# Altium PCB POWER.PcbDoc
Units mil, origin at the board's own origin, x right, y up, seen from the top; angles counter-clockwise.
Board outline 2661.42 x 2657.48 mil, 2 copper layers (Top Layer, Bottom Layer); 17 components, 3 nets, 37 pads, 4 vias.
Unrouted connection lines stored in the file: 1.
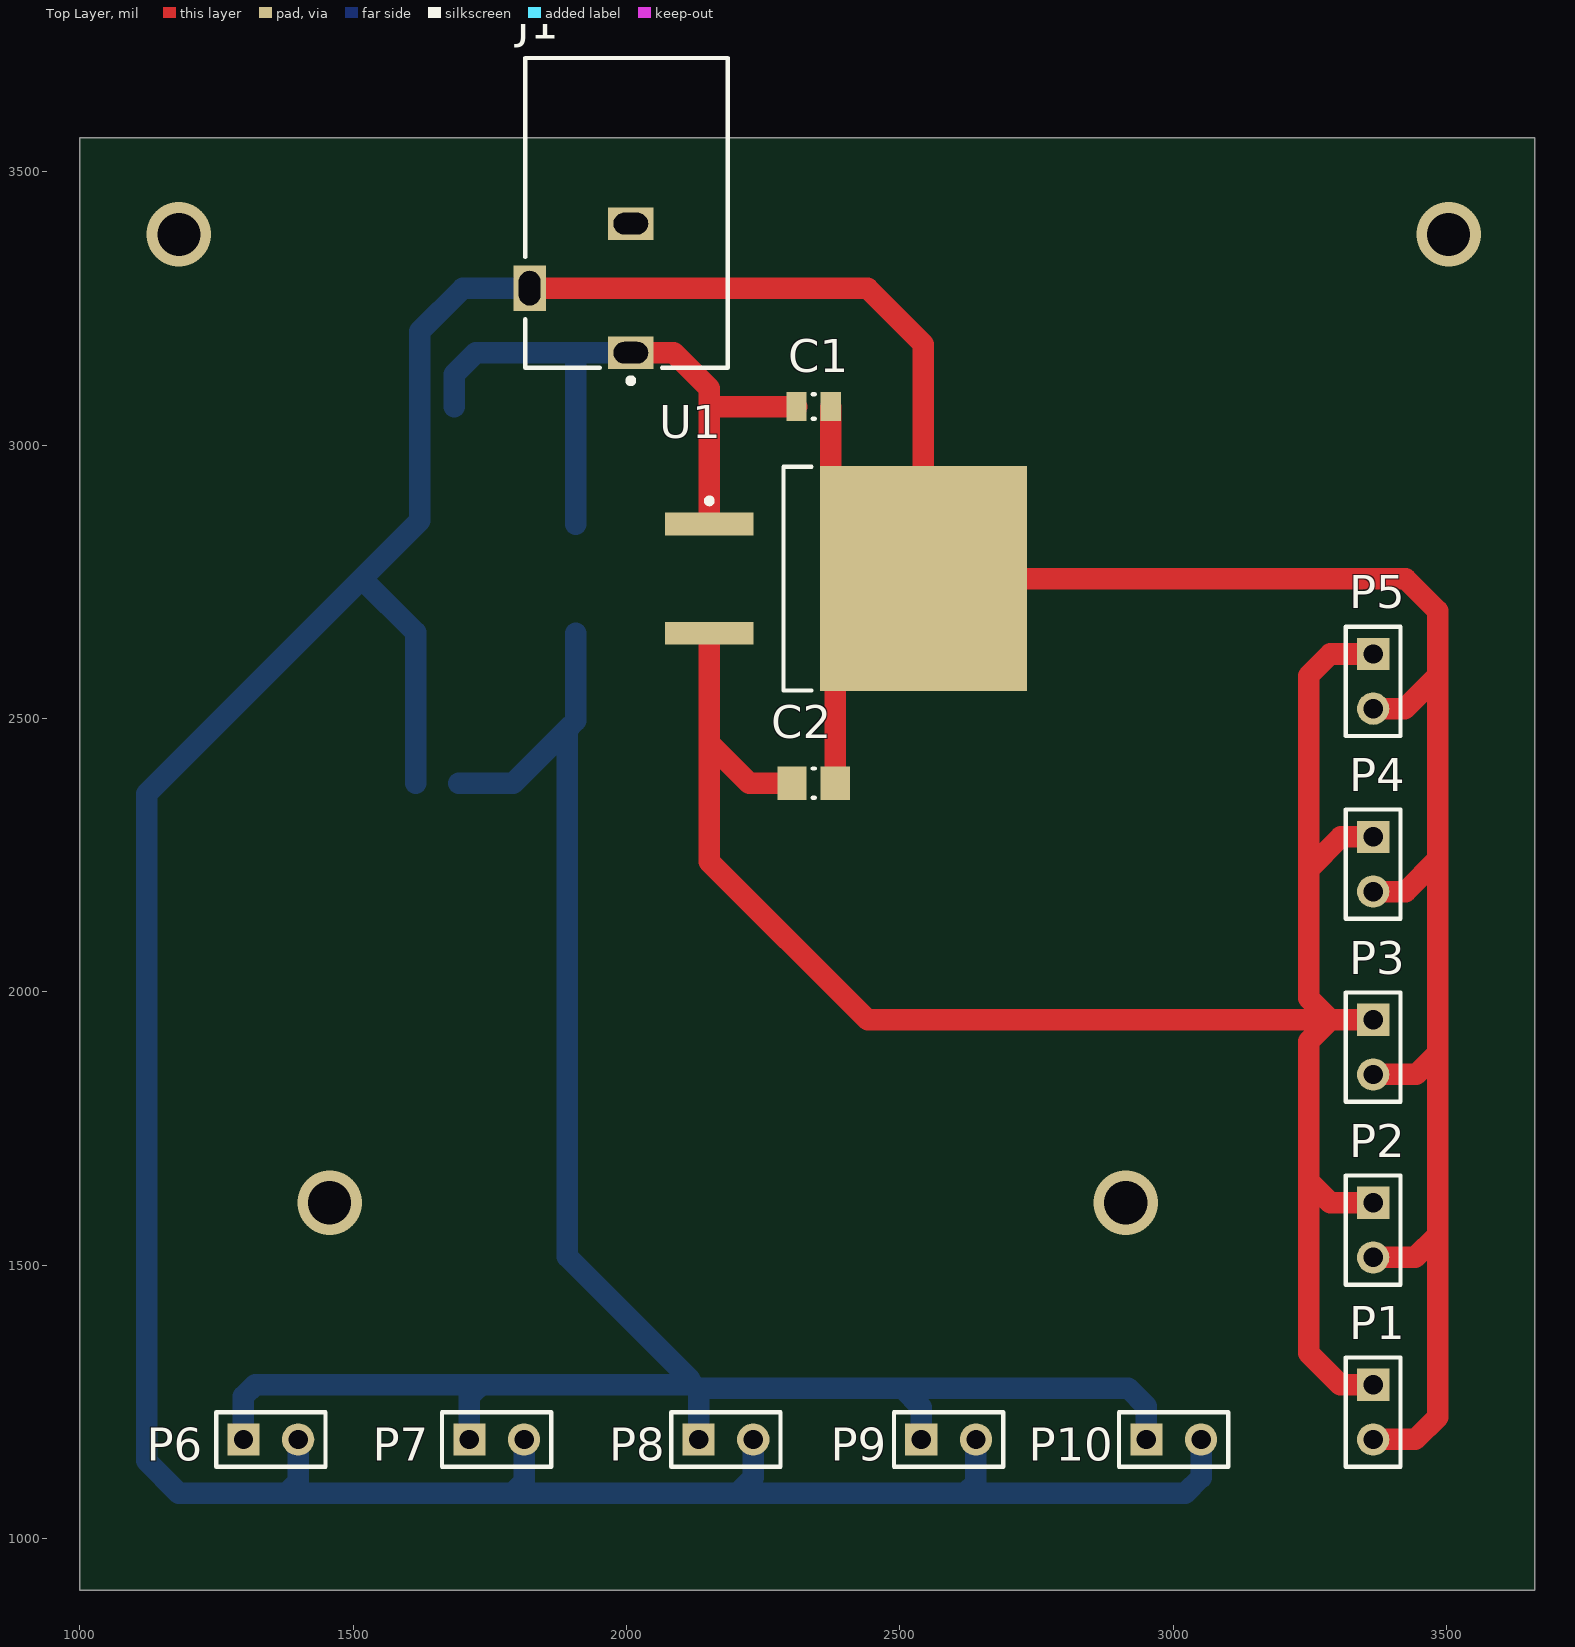
[diagram p0: Top Layer view]
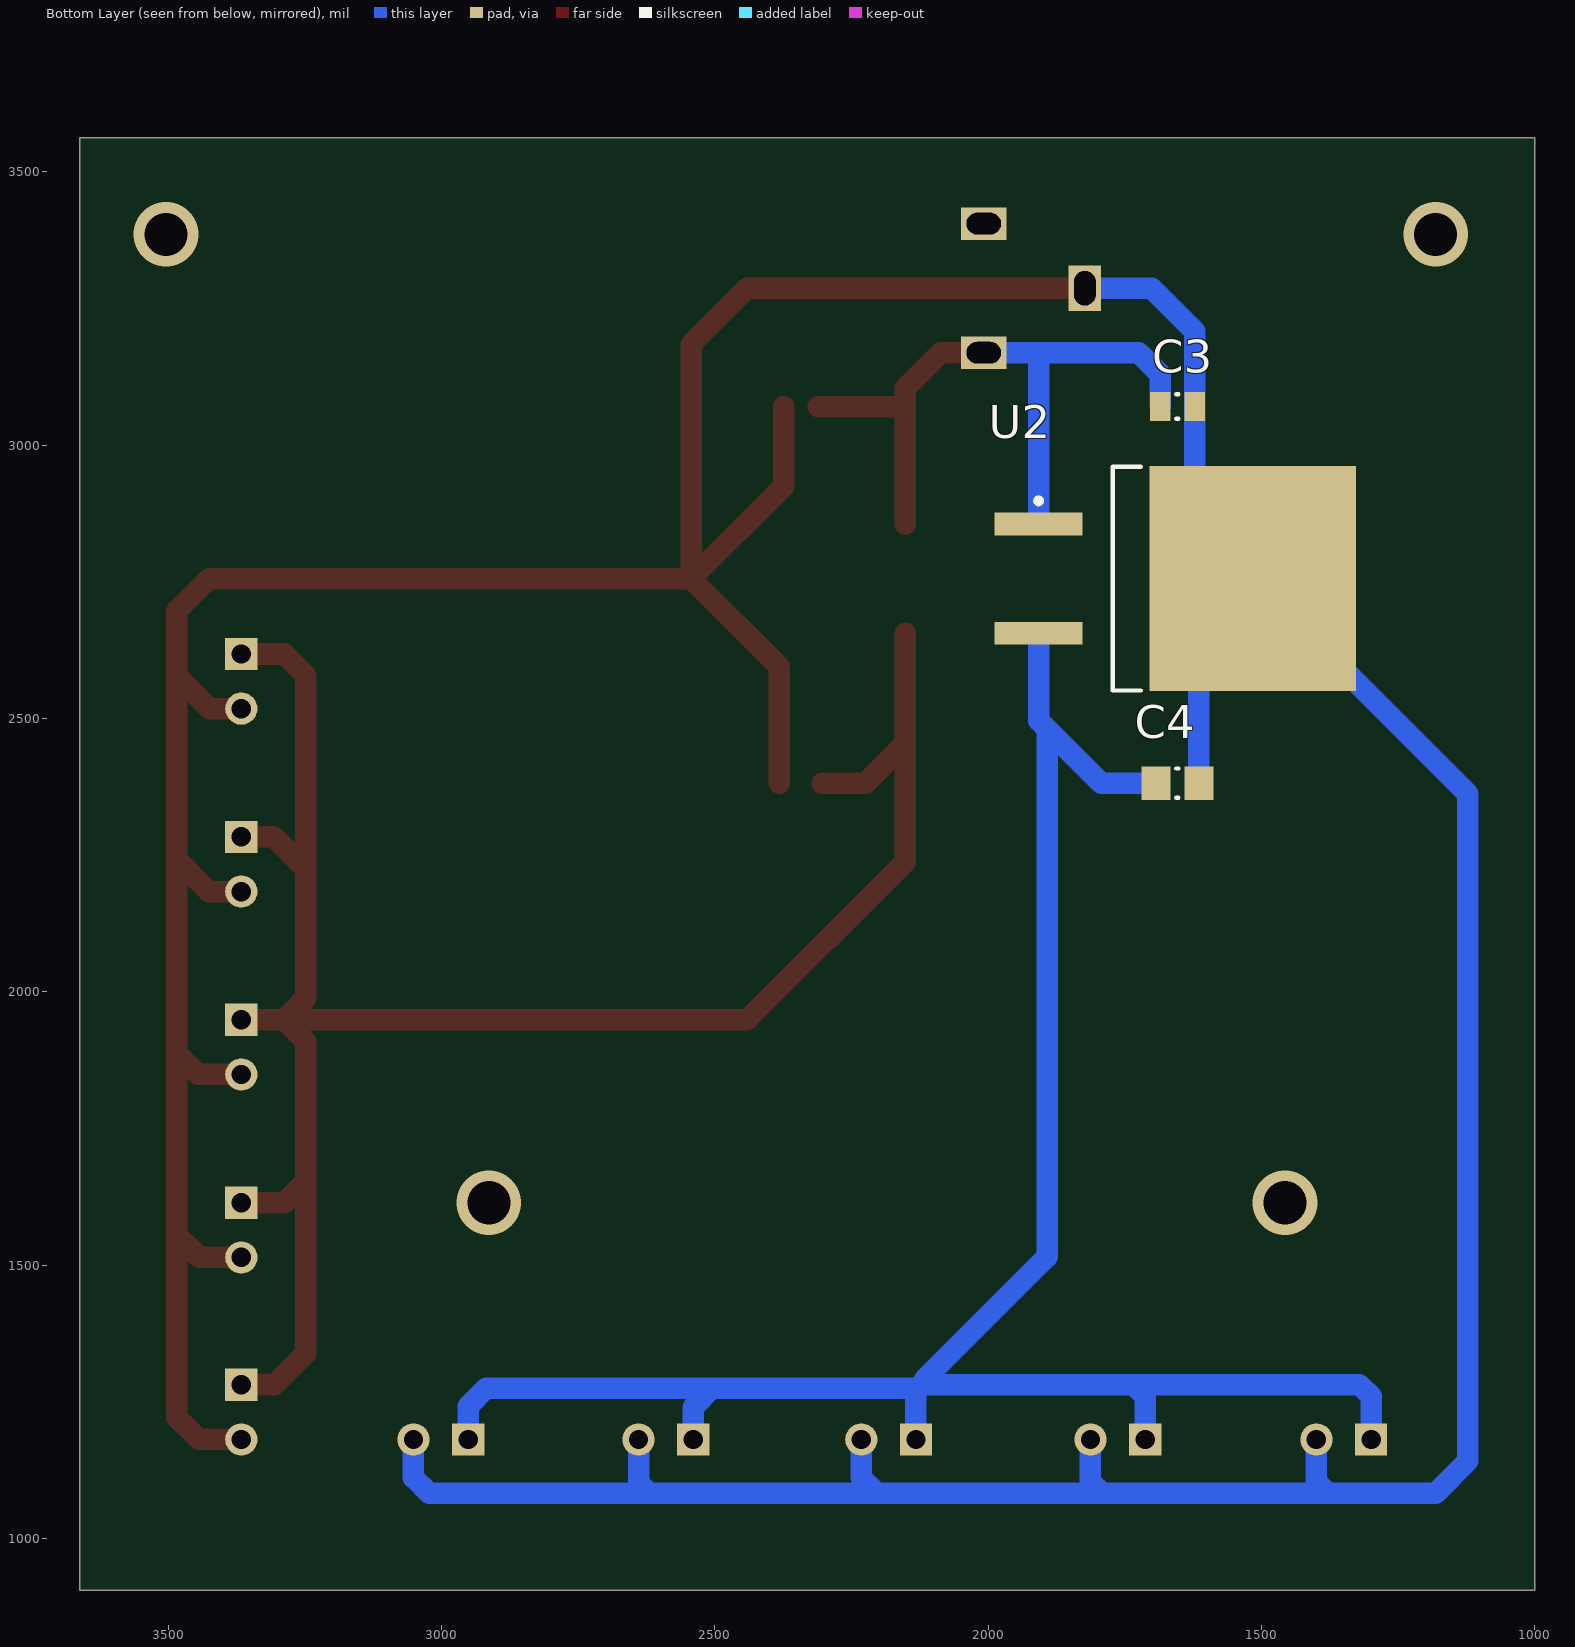
[diagram p1: Bottom Layer view, seen from below]

## Layer stack, top to bottom
Top Solder: solder mask 0.4, Solder Resist, Dk 3.5
Top Layer: signal copper 1.4
Dielectric 1: dielectric 12.6, FR-4, Dk 4.8
Bottom Layer: signal copper 1.4
Bottom Solder: solder mask 0.4, Solder Resist, Dk 3.5

## Board outline
1000,905.51 3661.42,905.51 3661.42,3562.99 1000,3562.99

## Design rules (kind name [scope] priority, off if disabled: settings)
Clearance [All] p1: gap=10 ignorepadtopadclearanceinfootprint=FALSE except(0: Arc-Hole Track-Hole SMDPad-Hole THPad-Hole Via-Hole Fill-Hole Poly-Hole Region-Hole Text-Hole)
PolygonConnect [All] p1: connectstyle=Relief reliefconductorwidth=10 reliefentries=4 polygonreliefangle="90 Angle" airgapwidth=10
RoutingVias [All] p1: holewidth=28 width=50 viastyle="Through Hole" minholewidth=28 minwidth=50 maxholewidth=78.74 maxwidth=118.11
SolderMaskExpansion [All] p1: expansion=4
Width [All] p1: maxlimit=39.37 minlimit=10 preferedwidth=39.37 minimp=50.000000 maximp=50.000000 favimp=50.000000
30 further rules are at their usual default settings.

## Components (designator, comment, footprint, x,y, rotation, side; value= is the part's Value field where it differs from the comment)
C1 "0805 330nF" CAPC0805(2012)100_L 2342.52,3070.87 r0 top value=330nF
C2 "0805 100nF" CAPC0805(2012)100_M 2342.52,2381.89 r180 top value=100nF
C3 "0805 330nF" CAPC0805(2012)100_L 1653.54,3070.87 r180 bottom value=330nF
C4 "0805 100nF" CAPC0805(2012)100_M 1653.54,2381.89 r0 bottom value=100nF
J1 "PJ-102B" CUI-PJ-102B_V 2007.87,3287.4 r90 top
P1 "Header 2" HDR1X2 3366.14,1281.1 r270 top
P2 "Header 2" HDR1X2 3366.14,1614.17 r270 top
P3 "Header 2" HDR1X2 3366.14,1948.82 r270 top
P4 "Header 2" HDR1X2 3366.14,2283.46 r270 top
P5 "Header 2" HDR1X2 3366.14,2618.11 r270 top
P6 "Header 2" HDR1X2 1299.21,1181.1 r0 top
P7 "Header 2" HDR1X2 1712.6,1181.1 r0 top
P8 "Header 2" HDR1X2 2131.89,1181.1 r0 top
P9 "Header 2" HDR1X2 2539.37,1181.1 r0 top
P10 "Header 2" HDR1X2 2951.18,1181.1 r0 top
U1 "L7805ABD2T-TR" TO-263_M 2401.57,2755.91 r0 top
U2 "L7805ABD2T-TR" TO-263_M 1657.48,2755.91 r180 bottom

## Footprints (in the part's own frame and the unit in brackets; to place one, negate y for a bottom-side part, rotate by r counter-clockwise, add the part's x,y. Pads: shape width x height; smd on the part's side, far side on the other; paste and mask are expansions set on the pad)
CAPC0805(2012)100_L [mm] "Chip Capacitor, Body 2.0x1.2mm, Height 1.0mm, IPC High Density"
  rect 0.95x1.35 smd: 1(-0.8,0) 2(0.8,0)
  silkscreen extent -0.05,-0.58 0.05,0.58, body extent -1.1,-0.72 1.1,0.72, height 1
CAPC0805(2012)100_M [mm] "Chip Capacitor, Body 2.0x1.2mm, Height 1.0mm, IPC Low Density"
  rect 1.35x1.55 smd: 1(-1,0) 2(1,0)
  silkscreen extent -0.05,-0.67 0.05,0.67, body extent -1.1,-0.72 1.1,0.72, height 1
CUI-PJ-102B_V [mm] "THD, 3-Leads, Body 14.4x9mm, Height 11mm"
  rect 1.5x2.1 hole 1 slot 1.6 at 90 deg: 1(-3,0) 2(3,0)
  rect 2.1x1.5 hole 1 slot 1.6 at 0 deg: 3(0,4.7)
  silkscreen extent -4.42,-4.5 10.7,4.9, body extent -3.7,-4.5 10.7,4.9, height 11
HDR1X2 [mm] "Connector; Header; 2 Position"
  rect 1.5x1.5 hole 0.9: 1(0,0)
  round 1.5 hole 0.9: 2(2.54,0)
  silkscreen extent -1.27,-1.27 3.81,1.27
TO-263_M [mm] "D2-PAK, 4-Leads, Body 9.2x10.2mm, Pitch 2.54mm, Lead Span 15.4mm, IPC Low Density"
  rect 4.1x1.05 smd: 1(-6.35,2.54) 3(-6.35,-2.54)
  rect 9.6x10.45 smd: 4(3.6,0)
  silkscreen extent -6.47,-5.2 -1.6,5.2, body extent -2.9,-5.2 6.45,5.2, height 4.6

## Part data
C1 C3: library part CMP-1036-04605-1, "CAP 330nF 50V ±5% 0805 (2012 Metric) Thickness 1mm SMD", Case-EIA=0805, Case-Metric=2012, Rated Voltage="50 V", Tolerance=±5%, Max Thickness="1 mm", Technology=SMT
C2 C4: library part CMP-1036-04420-1, "CAP 100nF 50V ±10% 0805 (2012 Metric) Thickness 1mm SMD", Case-EIA=0805, Case-Metric=2012, Rated Voltage="50 V", Tolerance=±10%, Max Thickness="1 mm", Technology=SMT
J1: library part CMP-2000-06900-1, "Through Hole Right Angle DC Power Jack, 2.5 A, 2.5 mm Center Pin, 3 Position, -25 to 85 degC, RoHS, Bulk", Current Rating=2.5A, Flammability Rating=UL94V-0, Insulation Resistance=100MOhms, Manufacturer=CUIInc., Operating Temperature Range=-25Cto+85C, Package Description="3-Pin Through Hole Device, Body 14.4 x 9 mm, Height 11 mm", Voltage Rating=24V, Brand=CUI, Connector Type=DCPowerJack, Contact Gender=Male, Contact Material=Copper, Contact Plating=Nickel, Datasheet URL=http://www.cui.com/product/resource/pj-102b.pdf, Datasheet Version="Rev. 1.03, 04/2016", Factory Pack Quantity=280, Housing Material=PolybutyleneTerephthalate(PBT), Inside Contact Diameter=2.5mm, Manufacturer URL=http://www.cui.com/, Mounting Angle=Right, Mounting Style=ThroughHole, Mounting Technology=ThroughHole, Outside Contact Diameter=6.5mm, Package Reference=PJ-102B, Packaging=Bulk, Product=Jacks, Product Category=DCPowerConnectors, RoHS=True, Termination Style=ThroughHole
P1 P2 P3 P4 P5 P6 P7 P8 P9 P10: "Header, 2-Pin", LatestRevisionDate=17-Jul-2002, LatestRevisionNote="Re-released for DXP Platform.", Publisher="Altium Limited"
U1 U2: library part CMP-0244-00199-1, "Positive Voltage Regulator, 3-Pin D2PAK, Tape and Reel", ComponentLink1Description="Manufacturer URL", ComponentLink1URL=http://www.st.com, ComponentLink2Description=Datasheet, ComponentLink2URL=http://www.st.com/internet/com/TECHNICAL_RESOURCES/TECHNICAL_LITERATURE/DATASHEET/CD00000444.pdf, DatasheetVersion=16/11/2011, PackageDescription="3-Pin Transistor Outline Package 2.54 mm Pitch, 15.4 mm Lead Span (D2PAK)", PackageReference=TO-263, PackageVersion=2011

## Via types
v1: diameter 118.11, hole 78.74, Top Layer to Bottom Layer, 4 vias

## Nets (pads, with @x,y where several pads share a name; then routed paths per layer and width w, separated by ;. In a path a pad name is that pad's centre, name@x,y a point inside that pad or via, vN(x,y) a via of type N, cw(c..) or ccw(c..) an arc to the next point about the centre after c; other vN are vias at no path point)
+5: C2.2 C4.2 P1.1 P2.1 P3.1 P4.1 P5.1 P6.1 P7.1 P8.1 P9.1 P10.1 U1.3 U2.3 | length 7571.3
  Top Layer w39.37: U1.3 2151.57,2454.72 ; C2.2 2224.41,2381.89 2151.57,2454.72 ; P1.1 3305.51,1281.1 3248.03,1338.58 3248.03,1653.54 ; P2.1 3287.4,1614.17 3248.03,1653.54 ; P3.1 3287.4,1948.82 ; P4.1 3307.09,2283.46 3248.03,2224.41 ; P5.1 3287.4,2618.11 3248.03,2578.74 3248.03,2224.41 ; 2151.57,2454.72 2151.57,2238.19 2440.94,1948.82 3287.4,1948.82 ; 3248.03,1653.54 3248.03,1909.45 3287.4,1948.82 ; 3248.03,2224.41 3248.03,1988.19 3287.4,1948.82
  Bottom Layer w39.37: P6.1 1299.21,1259.84 1320.47,1281.1 2122.05,1281.1 ; C4.2 1792.91,2381.89 1891.34,2480.32 ; P7.1 1712.6,1259.84 1727.95,1275.2 ; U2.3 1907.48,2496.46 1891.34,2480.32 ; 2116.14,1290.94 1891.34,1515.75 1891.34,2480.32 ; P8.1 2131.89,1275.2 2504.33,1275.2 ; P9.1 2539.37,1240.16 2504.33,1275.2 ; P10.1 2951.18,1241.73 2917.72,1275.2 2504.33,1275.2
GND: C1.2 C2.1 C3.2 C4.1 J1.3 P1.2 P2.2 P3.2 P4.2 P5.2 P6.2 P7.2 P8.2 P9.2 P10.2 U1.4 U2.4 | length 10537.3
  Top Layer w39.37: J1.3 2440.94,3287.4 2543.31,3185.04 U1.4 ; C1.2 2374.02,2925.2 U1.4 ; C2.1 2381.89,2594.49 U1.4 ; P1.2 3443.31,1181.1 3484.25,1222.05 3484.25,1555.12 ; P2.2 3443.31,1514.17 3484.25,1555.12 ; P3.2 3444.88,1848.82 3484.25,1888.19 ; P4.2 3425.2,2183.46 3484.25,2242.52 ; P5.2 3423.62,2518.11 3484.25,2578.74 ; U1.4 3425.2,2755.91 3484.25,2696.85 3484.25,2578.74 ; 3484.25,1555.12 3484.25,1888.19 ; 3484.25,1888.19 3484.25,2242.52 ; 3484.25,2242.52 3484.25,2578.74
  Bottom Layer w39.37: P6.2 1399.21,1103.94 1377.95,1082.68 ; C4.1 1614.17,2657.48 U2.4 ; P7.2 1812.6,1103.94 1791.34,1082.68 ; J1.3 1700.79,3287.4 1622.05,3208.66 C3.2 1622.05,2862.2 U2.4 ; P8.2 2231.89,1111.42 2203.15,1082.68 ; P9.2 2639.37,1102.36 2619.69,1082.68 ; P10.2 3051.18,1111.42 3022.44,1082.68 2619.69,1082.68 ; 1377.95,1082.68 1791.34,1082.68 ; 1377.95,1082.68 1181.1,1082.68 1122.05,1141.73 1122.05,2362.2 U2.4 ; 1791.34,1082.68 2203.15,1082.68 ; 2203.15,1082.68 2619.69,1082.68
VCC: C1.1 C3.1 J1.1 U1.1 U2.1 | length 1290.1
  Top Layer w39.37: J1.1 2086.61,3169.29 2151.57,3104.33 2151.57,3070.87 ; U1.1 2151.57,3070.87 ; C1.1 2151.57,3070.87
  Bottom Layer w39.37: C3.1 1685.04,3129.92 1724.41,3169.29 1907.48,3169.29 ; U2.1 1907.48,3169.29 ; J1.1 1907.48,3169.29
pads on no net: J1.2
copper on no net:
  other v1: 1456.69,1614.17 2913.39,1614.17 1181.1,3385.83 3503.94,3385.83

## Silkscreen, mask and mechanical layers (free items; w line width, h text height)
BoardOutline:
  lines w3.94: 1003.94,905.51 3661.42,905.51 3661.42,3562.99 1003.94,3562.99 1003.94,905.51